# EAGLE board quadcopter (EAGLE 8.1.1)
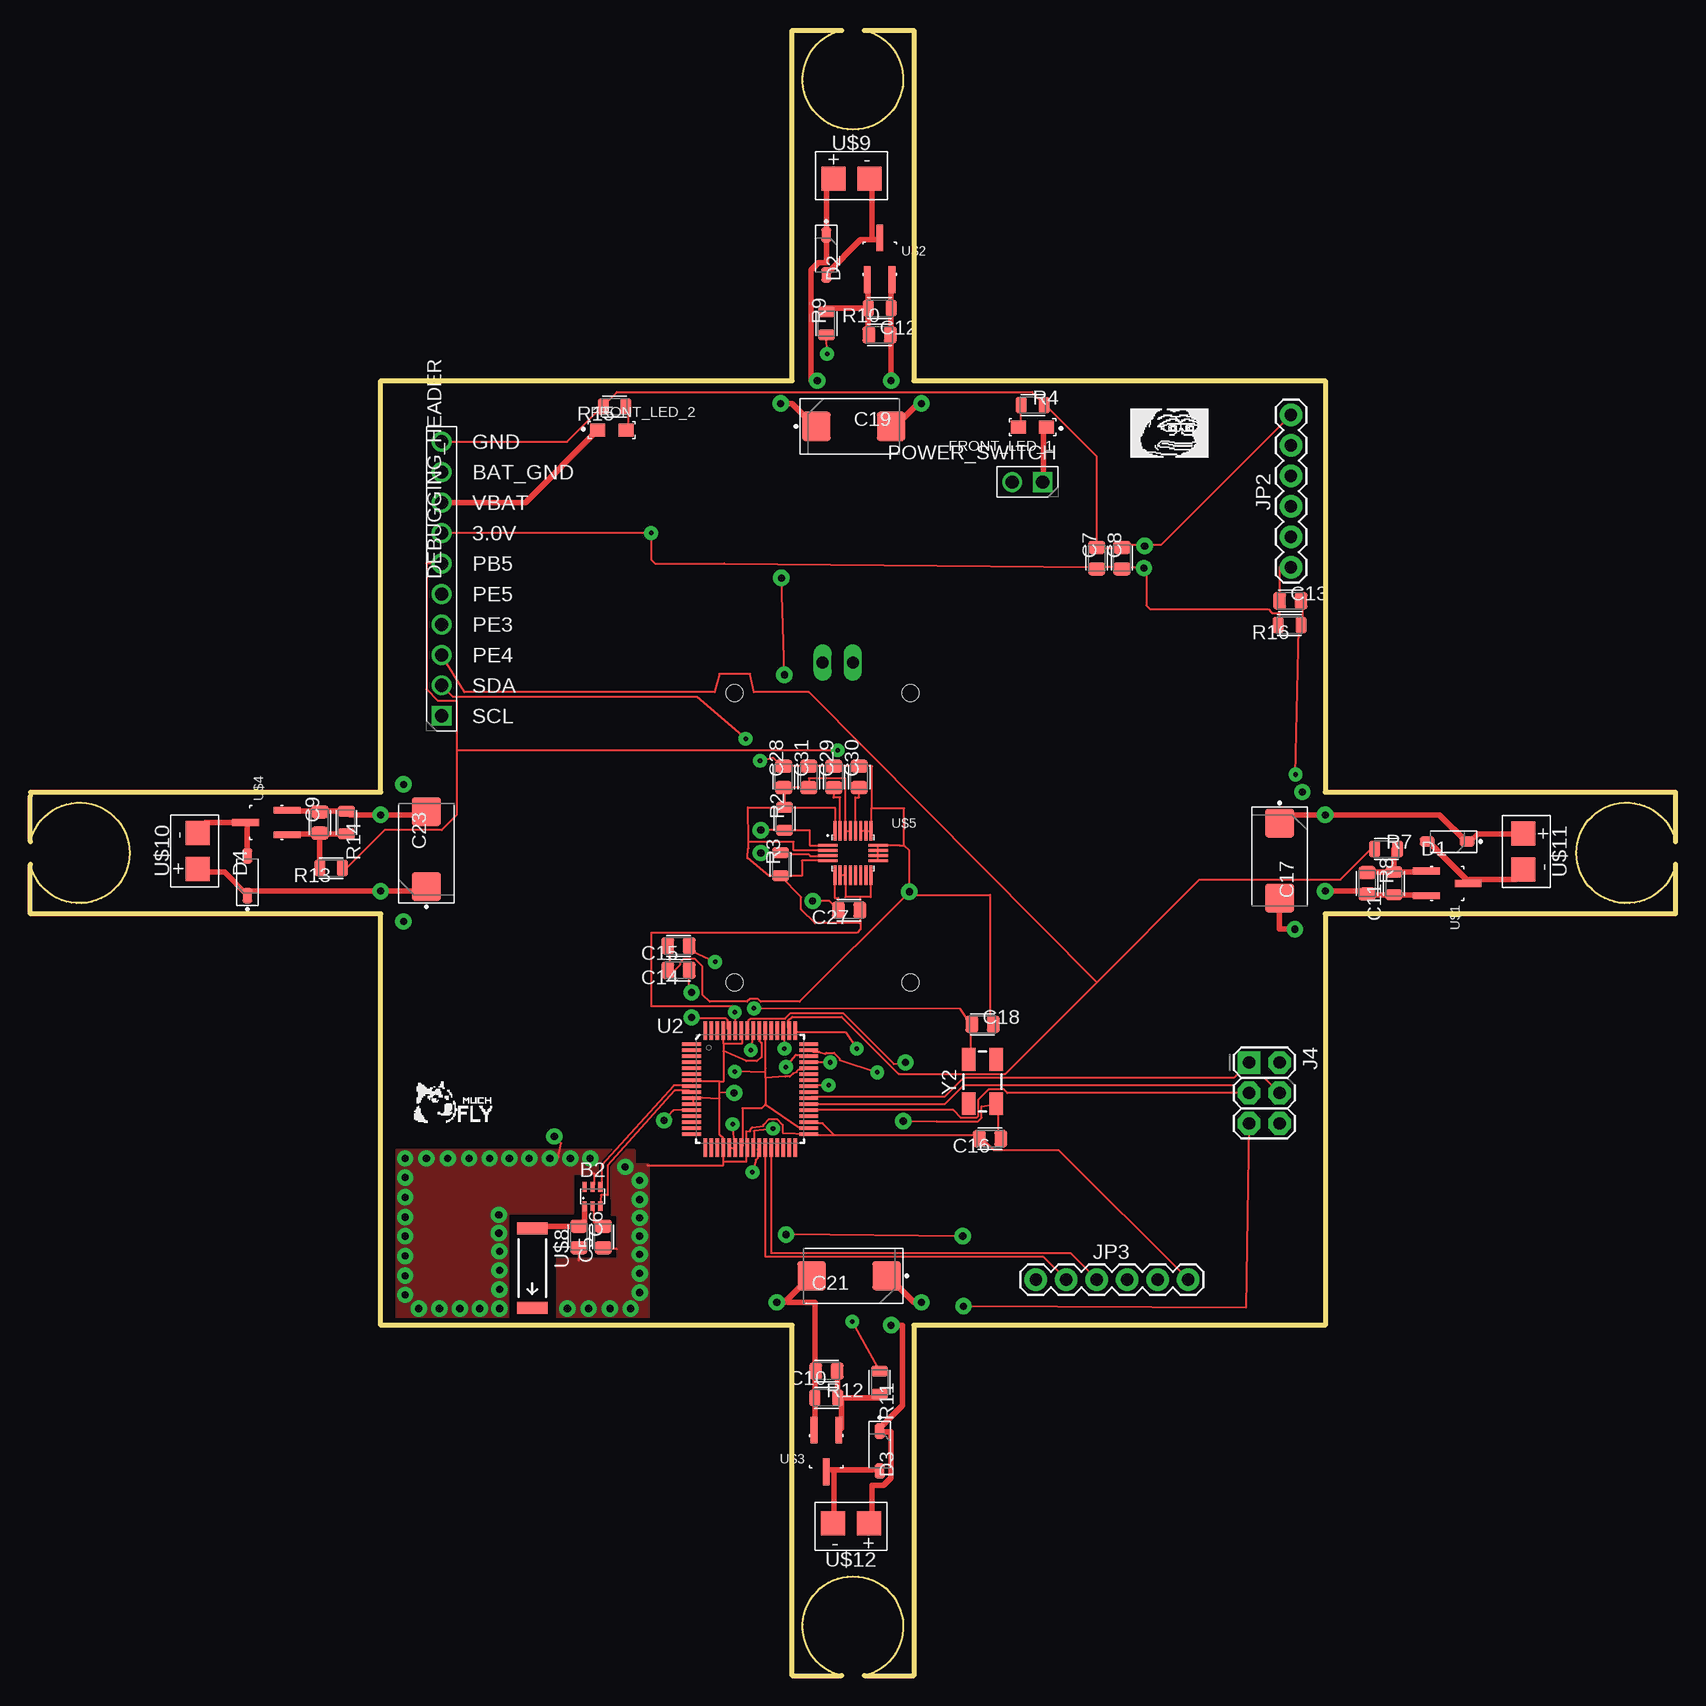
[diagram p0: board, top side]
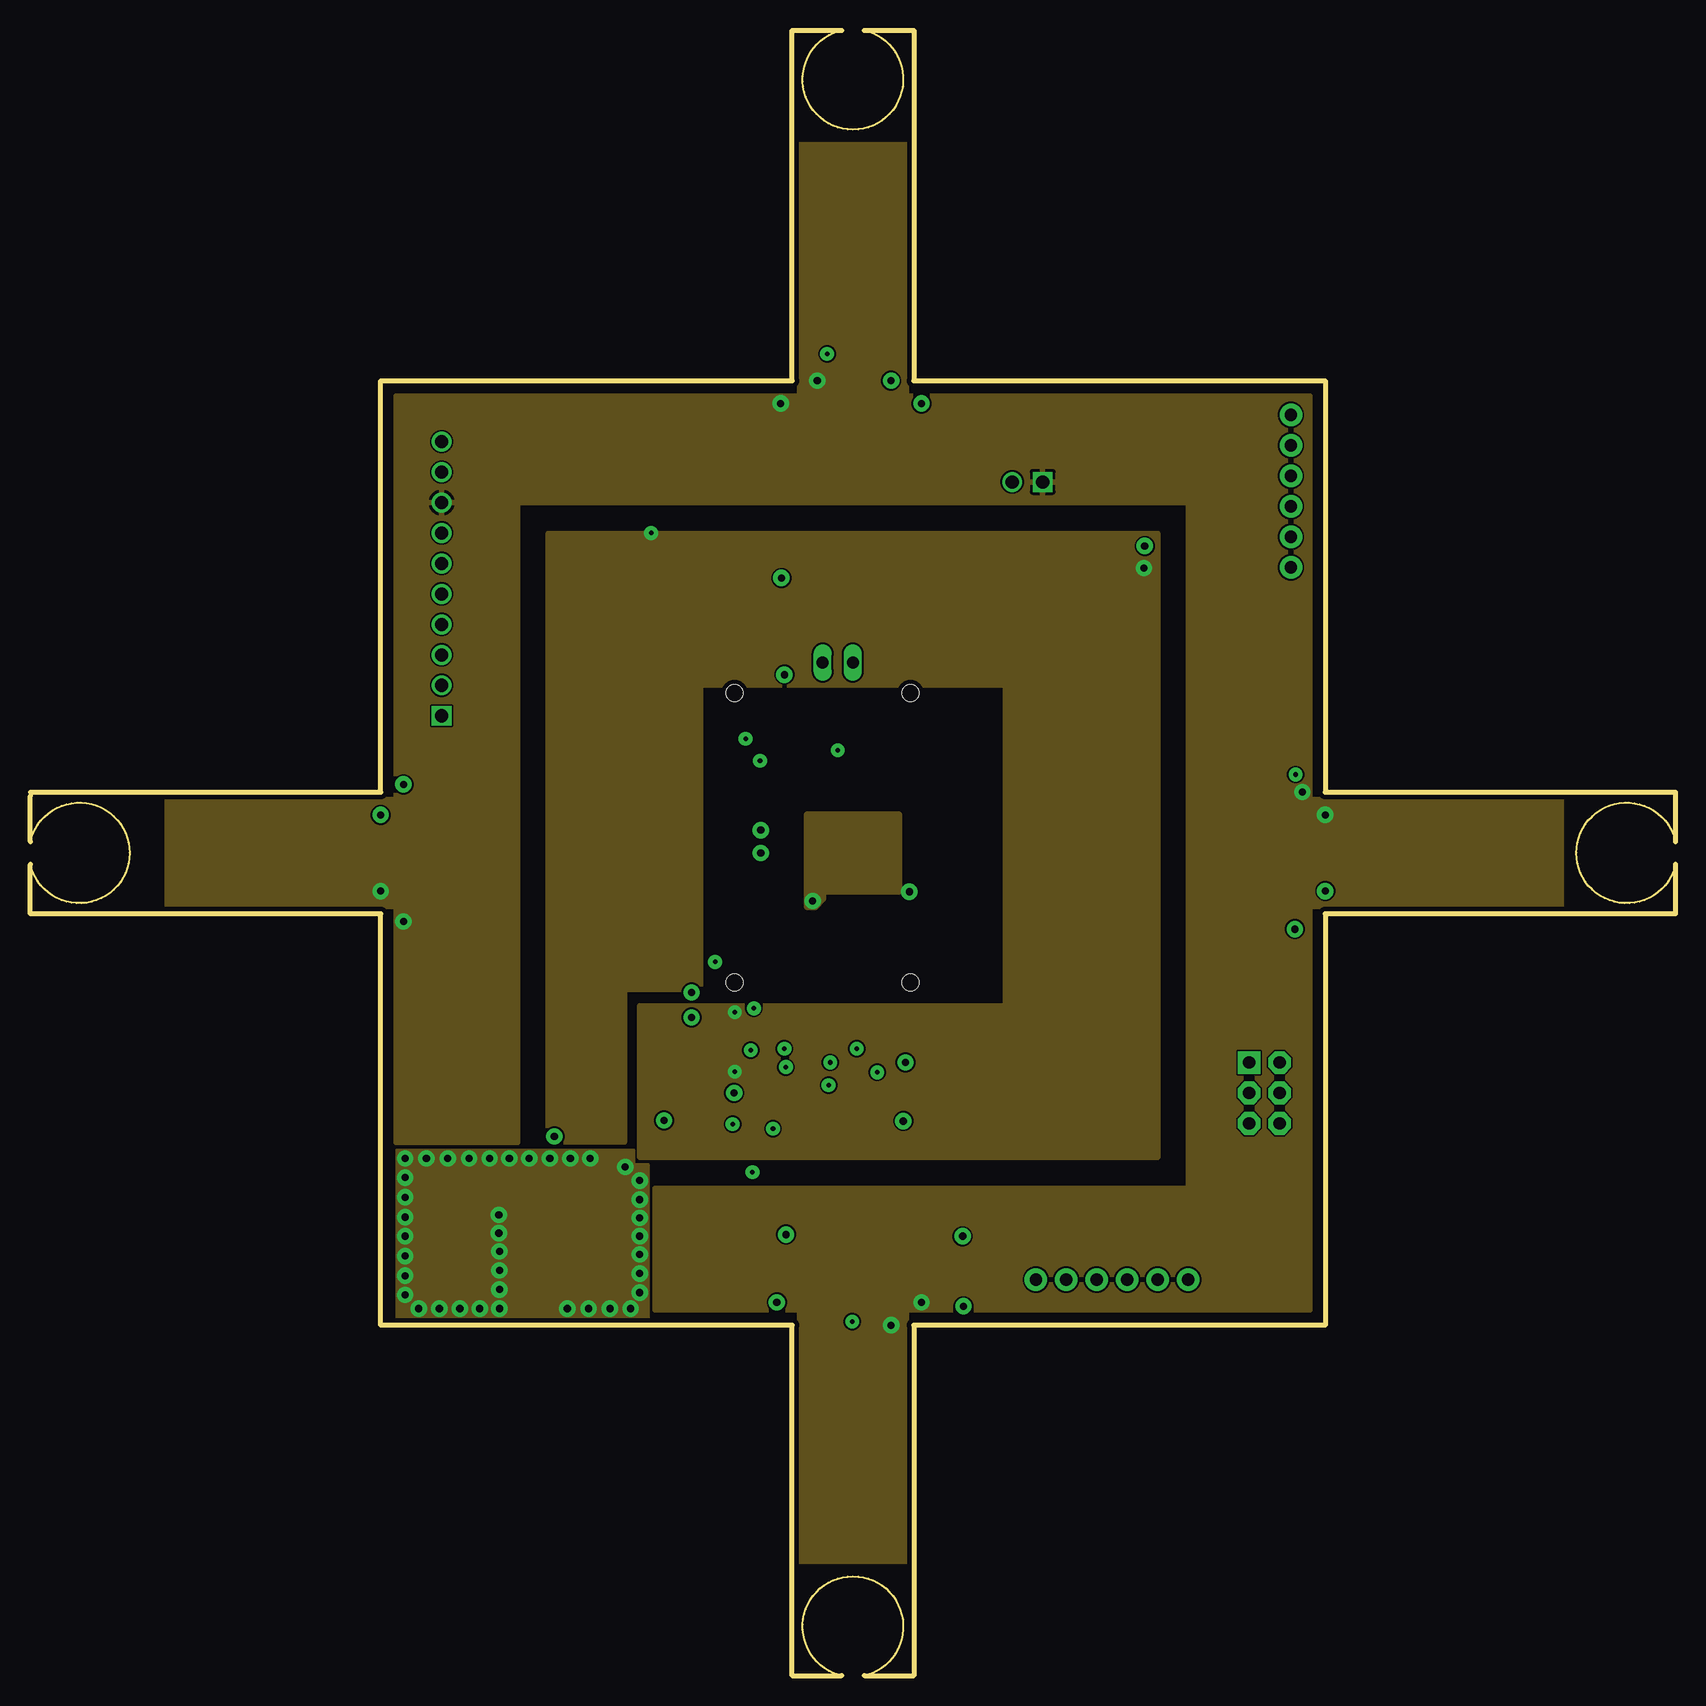
[diagram p1: board, inner layer Route2]
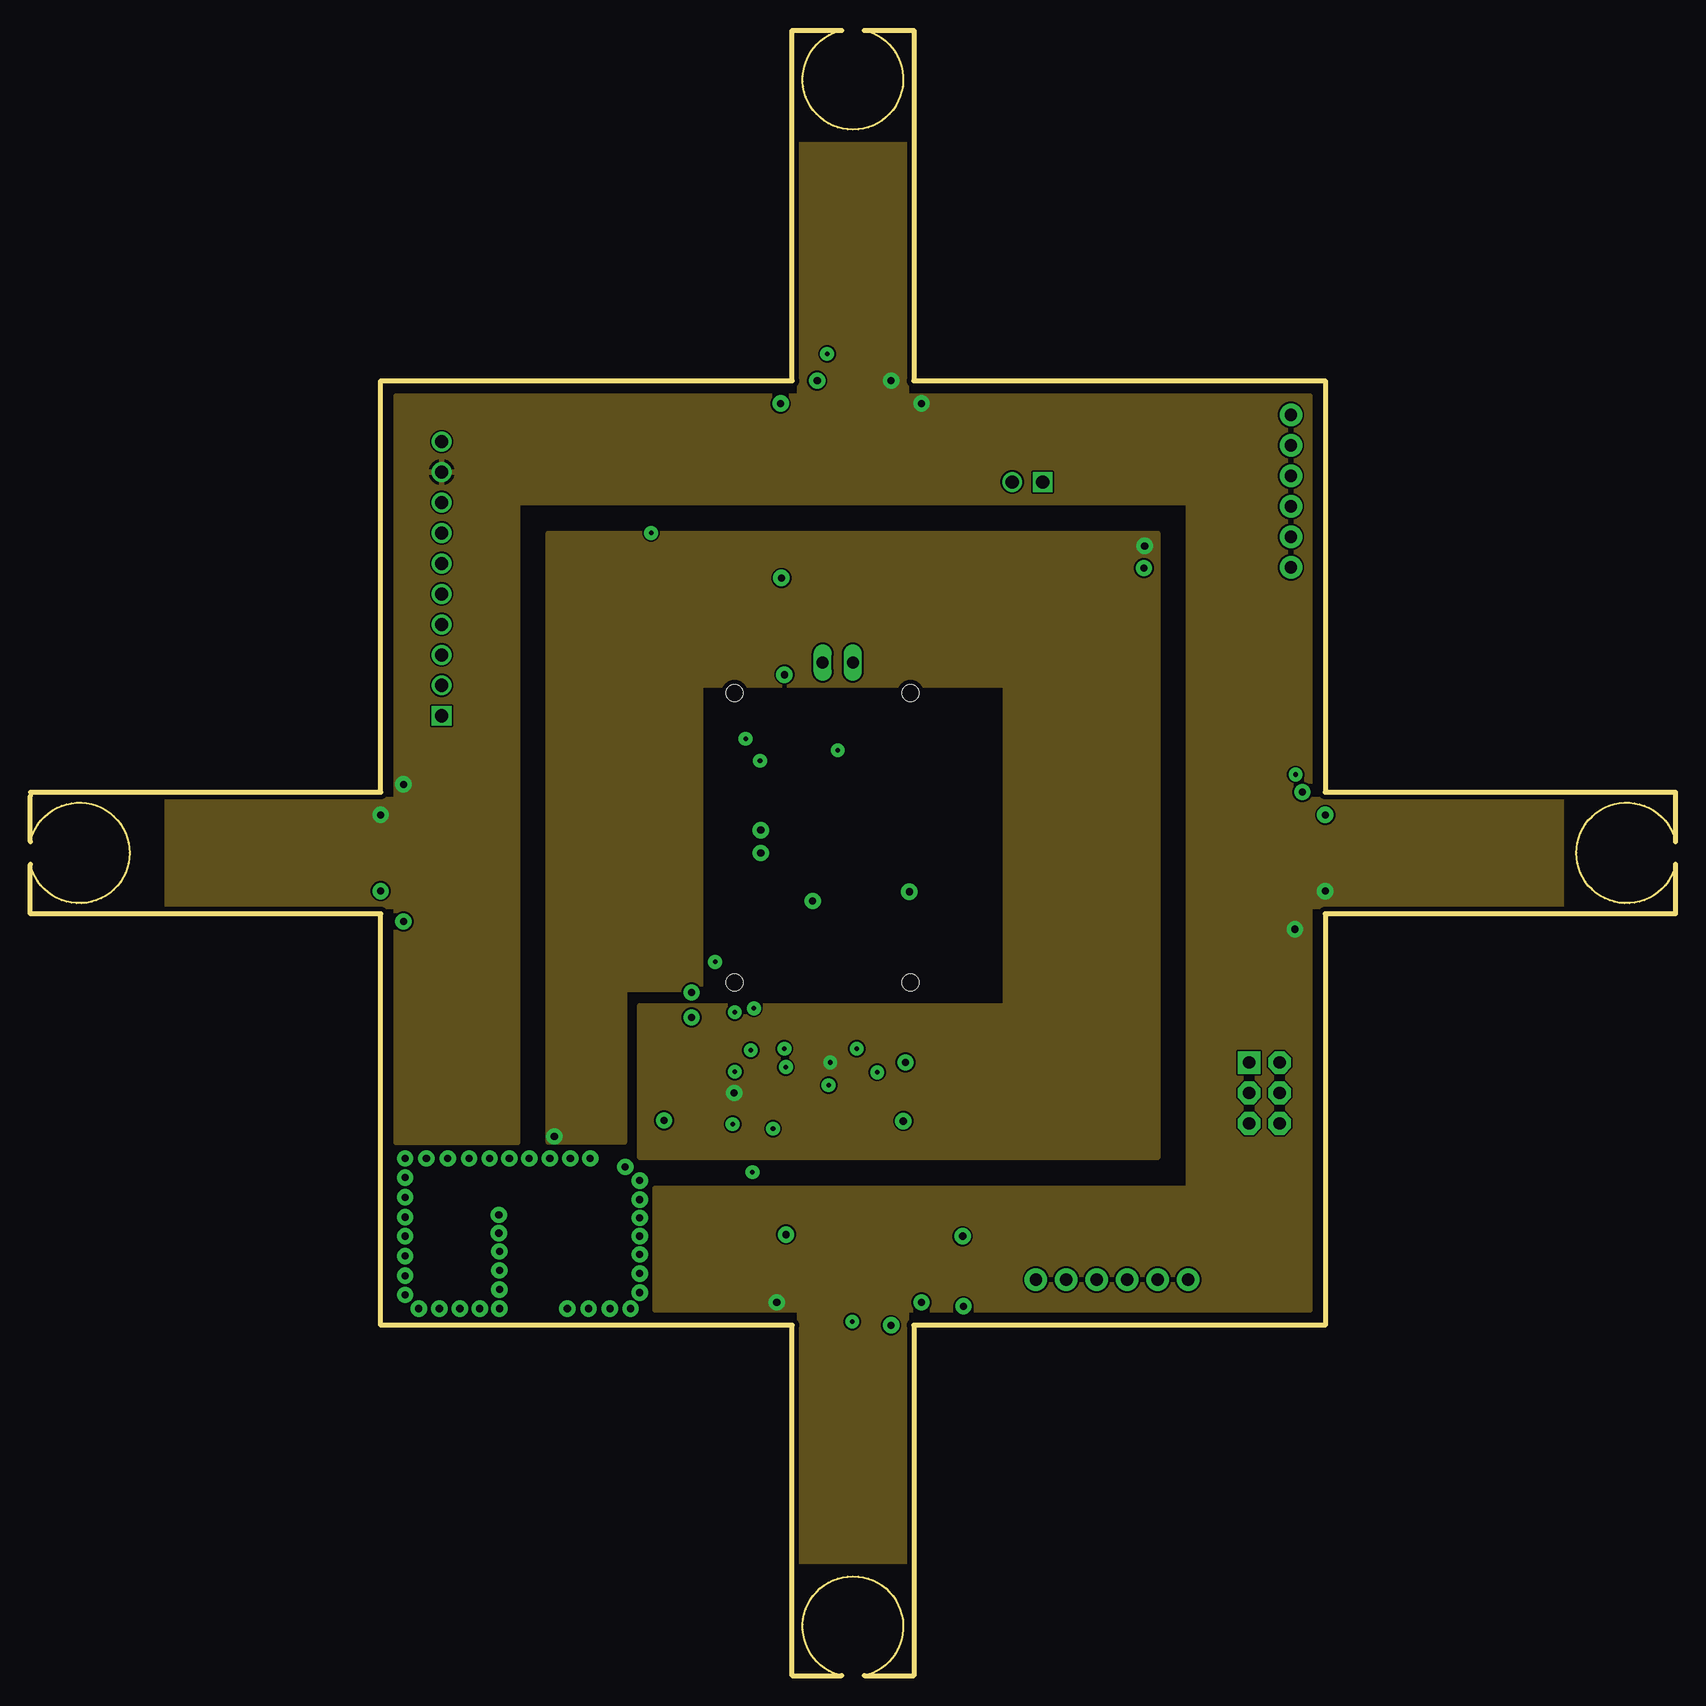
[diagram p2: board, inner layer Route15]
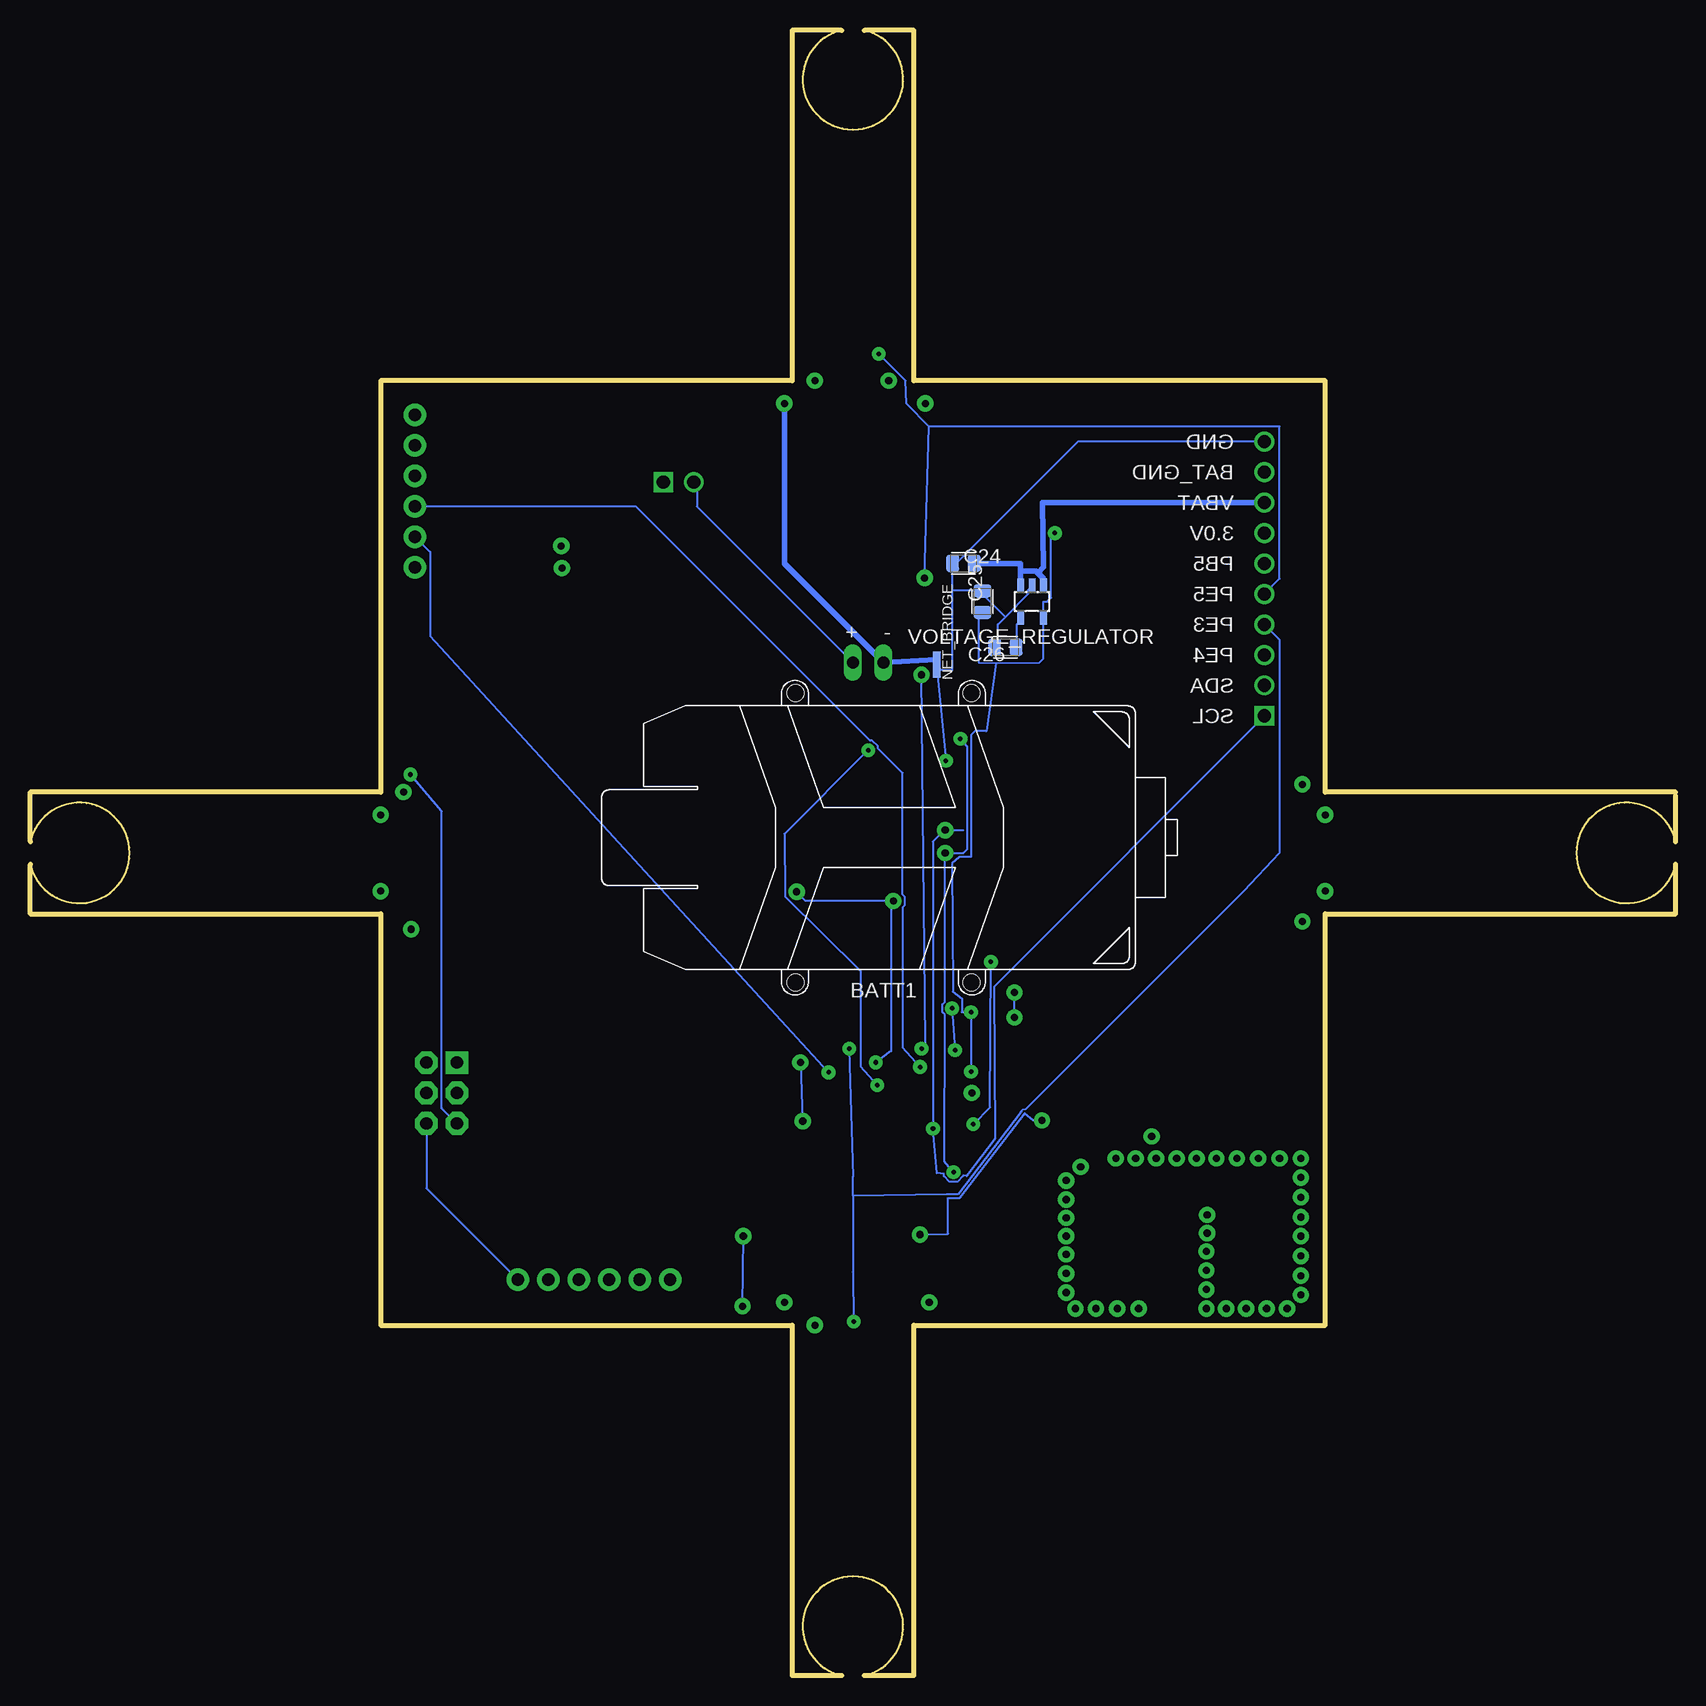
[diagram p3: board, bottom side, seen from below]

Size 137.21 x 137.21 mm. Coordinates in mm from the lower left corner, seen from the top.
Outline: 0.02,73.68 29.23,73.68 29.23,107.97 63.52,107.97 63.52,137.18 67.65,137.18
Outline: 137.21,67.8 arc-338 137.21,69.4
Outline: 137.18,67.65 137.18,63.52 107.97,63.52 107.97,29.23 73.68,29.23 73.68,0.02 69.56,0.02
Outline: 137.18,69.56 137.18,73.68 107.97,73.68 107.97,107.97 73.68,107.97 73.68,137.18 69.56,137.18
Outline: 69.4,137.21 arc-338 67.8,137.21
Outline: 0,69.4 arc-338 0,67.8
Outline: 0.02,67.65 0.02,63.52 29.23,63.52 29.23,29.23 63.52,29.23 63.52,0.02 67.65,0.02
Outline: 0.02,69.56 0.02,73.37
Outline: 67.8,0 arc-338 69.4,0
Copper layers (1*2*15*16): Top 0.035559375mm / dielectric 1.501140625mm / Route2 0.035559375mm / dielectric 0.149859375mm / Route15 0.035559375mm / dielectric 0.200659375mm / Bottom 0.035559375mm
Design rules "4pcb-66board": minimum track width 6mil, minimum drill 15mil, track to track 6mil, track to pad 6mil, pad to pad 6mil, via to via 6mil, smd to smd 6mil, copper to edge 15mil, drill to drill 10mil, minimum pad ring 10mil, minimum via ring 15mil, stop-mask expansion 4mil, vias tented up to drill 0mil, thermal gap 10mil
Net classes: 1 RFSIG: width 0.457 mm; 2 HIGHCURRENT: width 0.457 mm
tRestrict: 17 lines
bRestrict: area 64.8,65.4 to 72.4,71.8

## Footprints (pad centres in the part's own frame; a part is rotated, then mirrored left to right if it is on the bottom)
BALUN = smd 0.35 x 0.8: 1 -0.65,-0.8; 2 0,-0.8; 3 0.65,-0.8; 4 0.65,0.8; 5 0,0.8; 6 -0.65,0.8
BATTERY-W/HOLDER-380MAH-HUBSAN = drill 1 long: + -2.54,14.605; - 0,14.605 | hole 1.4: -7.35,-12.05; -7.35,12.05; 7.35,-12.05; 7.35,12.05
CAPC2012X140_HS = smd 1.08 x 1.42: 1 -0.895,0; 2 0.895,0
CAPMP7343X310_HS = smd 2.37 x 2.43: 1 -3.12,0; 2 3.12,0
SOD3716X135_HS = smd 1.25 x 0.8: A 1.665,0; C -1.665,0
HDRV10W63P254_10X1_2540X254H838_HS = drill 1.1 pad 1.65 square: 1 0,0 | drill 1.1 pad 1.65: 2 2.54,0; 3 5.08,0; 4 7.62,0; 5 10.16,0; 6 12.7,0; 7 15.24,0; 8 17.78,0; 9 20.32,0; 10 22.86,0
KINGBRIGHT_LED = smd 1.25 x 1.1: P$1 0,0; P$2 2.35,0
2X3-NS = drill 1.016 pad 1.88 square: 1 -2.54,-1.27 | drill 1.016 pad 1.88 octagon: 2 -2.54,1.27; 3 0,-1.27; 4 0,1.27; 5 2.54,-1.27; 6 2.54,1.27
FTDI_BASIC = drill 1.016 pad 1.88: CTS 10.16,0; DTR 0,0; GND 12.7,0; RXI 2.54,0; TXO 5.08,0; VCC 7.62,0
NET_BRIDGE = smd 1.27 x 0.635: P$1 0,0; P$2 0.9,0
MALE_HEADER_2X1_0.1IN = drill 1.1 pad 1.65 square: 1 0,0 | drill 1.1 pad 1.65: 2 2.54,0
RESC2012X60_HS = smd 0.92 x 1.38: 1 -0.955,0; 2 0.955,0
QFN-64 = smd 1.562 x 0.28: 1 -4.881,3.75; 2 -4.881,3.25; 3 -4.881,2.75; 4 -4.881,2.25; 5 -4.881,1.75; 6 -4.881,1.25; 7 -4.881,0.75; 8 -4.881,0.25; 9 -4.881,-0.25; 10 -4.881,-0.75; 11 -4.881,-1.25; 12 -4.881,-1.75; 13 -4.881,-2.25; 14 -4.881,-2.75; 15 -4.881,-3.25; 16 -4.881,-3.75; 33 4.881,-3.75; 34 4.881,-3.25; 35 4.881,-2.75; 36 4.881,-2.25; 37 4.881,-1.75; 38 4.881,-1.25; 39 4.881,-0.75; 40 4.881,-0.25; 41 4.881,0.25; 42 4.881,0.75; 43 4.881,1.25; 44 4.881,1.75; 45 4.881,2.25; 46 4.881,2.75; 47 4.881,3.25; 48 4.881,3.75 | smd 0.28 x 1.562: 17 -3.75,-4.881; 18 -3.25,-4.881; 19 -2.75,-4.881; 20 -2.25,-4.881; 21 -1.75,-4.881; 22 -1.25,-4.881; 23 -0.75,-4.881; 24 -0.25,-4.881; 25 0.25,-4.881; 26 0.75,-4.881; 27 1.25,-4.881; 28 1.75,-4.881; 29 2.25,-4.881; 30 2.75,-4.881; 31 3.25,-4.881; 32 3.75,-4.881; 49 3.75,4.881; 50 3.25,4.881; 51 2.75,4.881; 52 2.25,4.881; 53 1.75,4.881; 54 1.25,4.881; 55 0.75,4.881; 56 0.25,4.881; 57 -0.25,4.881; 58 -0.75,4.881; 59 -1.25,4.881; 60 -1.75,4.881; 61 -2.25,4.881; 62 -2.75,4.881; 63 -3.25,4.881; 64 -3.75,4.881
MOFSET_SI2302CDS-T1-E3CT-ND = smd 0.559 x 2.224: P$1 -1.032,-1.734; P$2 1.032,-1.734; P$3 0,1.734
IMU_497-14946-1-ND = smd 0.23 x 1.6: P$1 -1.505,1.85; P$6 -1.505,-1.85; P$7 -1.075,-1.85; P$8 -0.645,-1.85; P$9 -0.215,-1.85; P$10 0.215,-1.85; P$11 0.645,-1.85; P$12 1.075,-1.85; P$13 1.505,-1.85; P$18 1.505,1.85; P$19 1.075,1.85; P$20 0.645,1.85; P$21 0.215,1.85; P$22 -0.215,1.85; P$23 -0.645,1.85; P$24 -1.075,1.85 | smd 1.6 x 0.23: P$2 -2.1,0.645; P$3 -2.1,0.215; P$4 -2.1,-0.215; P$5 -2.1,-0.645; P$14 2.1,-0.645; P$15 2.1,-0.215; P$16 2.1,0.215; P$17 2.1,0.645
ANTENNA-CHIP5 = smd 1.016 x 2.54: FEED -3.302,0; NC 3.302,0
MOTOR_PADS = smd 2 x 2: V+ -1,0; V- 2,0
SOT23-DBV = smd 0.55 x 1.2: 1 -0.95,-1.3; 2 0,-1.3; 3 0.95,-1.3; 4 0.95,1.3; 5 -0.95,1.3
CRYSTAL-SMD-5X3 = smd 1.9 x 1.1: 1 -1.85,-1.15; 2 1.85,-1.15; 3 1.85,1.15; 4 -1.85,1.15

## Placement (x,y rotation side)
B2  BALUN0805  [BALUN]  46.89,39.96 0 top
BATT1  BATTERY-HUBSAN-W/HOLDER  [BATTERY-W/HOLDER-380MAH-HUBSAN]  66.06,69.87 0 bottom
C5  0.75pF  [CAPC2012X140_HS]  45.74,36.6 270 top
C6  22pF  [CAPC2012X140_HS]  47.77,36.6 90 top
C7  1uF  [CAPC2012X140_HS]  88.92,93.18 90 top
C8  1uF  [CAPC2012X140_HS]  91.02,93.18 90 top
C9  0.1uF  [CAPC2012X140_HS]  24.15,71.14 90 top
C10  0.1uF  [CAPC2012X140_HS]  66.38,25.42 180 top
C11  0.1uF  [CAPC2012X140_HS]  111.47,66.06 270 top
C12  0.1uF  [CAPC2012X140_HS]  70.83,111.78 0 top
C13  0.1uF  [CAPC2012X140_HS]  105.05,89.62 0 top
C14  12pF  [CAPC2012X140_HS]  54.06,58.82 180 top
C15  12pF  [CAPC2012X140_HS]  54.06,60.86 180 top
C16  12pF  [CAPC2012X140_HS]  80.03,44.79 180 top
C17  220uF  [CAPMP7343X310_HS]  104.16,67.97 270 top
C18  12pF  [CAPC2012X140_HS]  79.4,54.32 0 top
C19  220uF  [CAPMP7343X310_HS]  68.67,104.16 0 top
C21  220uF  [CAPMP7343X310_HS]  68.29,33.36 180 top
C23  220uF  [CAPMP7343X310_HS]  33.04,68.92 90 top
C24  1uF  [CAPC2012X140_HS]  59.4,92.73 0 bottom
C25  1uF  [CAPC2012X140_HS]  57.81,89.56 90 bottom
C26  0.01uF  [CAPC2012X140_HS]  55.9,85.75 180 bottom
C27  0.1uF  [CAPC2012X140_HS]  68.29,63.84 180 top
C28  0.1uF  [CAPC2012X140_HS]  62.82,74.95 90 top
C29  0.1uF  [CAPC2012X140_HS]  67.02,74.95 90 top
C30  0.01uF  [CAPC2012X140_HS]  69.11,74.95 90 top
C31  10uF  [CAPC2012X140_HS]  64.92,74.95 90 top
D1  360mV  [SOD3716X135_HS]  118.13,69.56 180 top
D2  360mV  [SOD3716X135_HS]  66.38,118.45 270 top
D3  360mV  [SOD3716X135_HS]  70.83,18.76 270 top
D4  360mV  [SOD3716X135_HS]  18.12,66.7 90 top
DEBUGGING_HEADER  [HDRV10W63P254_10X1_2540X254H838_HS]  34.31,80.03 90 top
FRONT_LED_1  GREEN  [KINGBRIGHT_LED]  84.73,104.1 180 top
FRONT_LED_2  GREEN  [KINGBRIGHT_LED]  47.33,103.84 0 top
J4  AVR_SPI_PRG_6NS  [2X3-NS]  102.89,48.6 270 top
JP2  FTDI_BASICPTH  [FTDI_BASIC]  105.12,92.42 90 top
JP3  FTDI_BASICPTH  [FTDI_BASIC]  83.84,33.04 0 top
NET_BRIDGE  NET_BRIDGE  [NET_BRIDGE]  61.62,83.84 90 bottom
POWER_SWITCH  [MALE_HEADER_2X1_0.1IN]  84.41,99.53 180 top
R2  10K  [RESC2012X60_HS]  62.89,71.46 90 top
R3  10K  [RESC2012X60_HS]  62.57,67.65 90 top
R4  20  [RESC2012X60_HS]  83.59,105.94 0 top
R7  100  [RESC2012X60_HS]  113.05,68.92 0 top
R8  10K  [RESC2012X60_HS]  113.69,66.06 90 top
R9  100  [RESC2012X60_HS]  66.38,112.74 90 top
R10  10K  [RESC2012X60_HS]  70.83,114.01 180 top
R11  100  [RESC2012X60_HS]  70.83,24.47 270 top
R12  10K  [RESC2012X60_HS]  66.38,23.2 0 top
R13  100  [RESC2012X60_HS]  25.11,67.33 180 top
R14  10K  [RESC2012X60_HS]  26.38,71.14 270 top
R15  20  [RESC2012X60_HS]  48.73,105.81 180 top
R16  10K  [RESC2012X60_HS]  104.99,87.59 180 top
U2  ATMEGA128RFA1  [QFN-64]  60.03,48.92 0 top
U$1  [MOFSET_SI2302CDS-T1-E3CT-ND]  118.13,66.06 270 top
U$2  [MOFSET_SI2302CDS-T1-E3CT-ND]  70.83,118.13 0 top
U$3  [MOFSET_SI2302CDS-T1-E3CT-ND]  66.38,18.76 180 top
U$4  [MOFSET_SI2302CDS-T1-E3CT-ND]  19.71,71.14 90 top
U$5  IMU_497-14946-1-ND  [IMU_497-14946-1-ND]  68.6,68.6 0 top
U$6  [LE_PEPE]  91.78,101.62 0 top
U$7  [DOGE]  32.09,45.74 0 top
U$8  ANTENNA2SMD5  [ANTENNA-CHIP5]  41.87,34 270 top
U$9  MOTOR_PADS  [MOTOR_PADS]  67.97,124.8 0 top
U$10  MOTOR_PADS  [MOTOR_PADS]  13.99,68.29 90 top
U$11  MOTOR_PADS  [MOTOR_PADS]  124.48,69.24 270 top
U$12  MOTOR_PADS  [MOTOR_PADS]  68.92,12.72 180 top
VOLTAGE_REGULATOR  TPS73633-DBVT  [SOT23-DBV]  53.68,89.56 180 bottom
Y2  [CRYSTAL-SMD-5X3]  79.4,49.55 90 top

## Library data of the parts
B2 = quadparts_prebuilt; DATASHEET: http://katalog.we-online.de/pbs/datasheet/748421245.pdf; DIST: Digikey; DISTPN: 732-2230-6-ND; MFR: Wurth Electronics Inc; MPN: 748421245; PRICE: 2.63
BATT1 = quadparts_prebuilt; CREATOR: Swanson; DIST: AMAZON; DISTPN: http://www.amazon.com/dp/B00RROB6Q4?smid=AMNTPWSAB5H0S; MFR: HUBSAN; MPN: X4-H107C-8-in-1
C5 = quadparts_prebuilt; DIST: Digikey; DISTPN: 490-3585-1-ND; MFR: Murata Electronics North America; MPN: GQM2195C2AR75CB01D
C6 = quadparts_prebuilt; DIST: Digikey; DISTPN: 490-5534-1-ND; MFR: Murata Electronics North America; MPN: GRM21A5C2E220JW01D
C7 C8 C24 C25 = quadparts_prebuilt; DIST: Digikey; DISTPN: 490-4736-1-ND; MFR: Murata Electronics North America; MPN: GRM21BR71H105KA12L
C9-C13 C27-C29 = quadparts_prebuilt; DIST: Digikey; DISTPN: 490-1666-1-ND; MFR: Murata Electronics North America; MPN: GRM21BR71H104KA01L
C14-C16 C18 = quadparts_prebuilt; DIST: Digikey; DISTPN: 490-5531-1-ND; MFR: Murata Electronics North America; MPN: GRM21A5C2E120JW01D
C17 C19 C21 C23 = quadparts_prebuilt; DIST: Digikey; DISTPN: 478-8912-1-ND; MFR: AVX Corporation; MPN: TAJD227K006RNJ
C26 C30 = quadparts_prebuilt; DIST: Digikey; DISTPN: 490-8295-1-ND; MFR: Murata Electronics North America; MPN: GRM2195C1H103FA01D
C31 = quadparts_prebuilt; DIST: Digikey; DISTPN: 490-5523-1-ND; MFR: Murata Electronics North America; MPN: GRM21BR61E106KA73L
D1-D4 = quadparts_prebuilt; DIST: Digikey; DISTPN: CRS08QMCT-ND; MFR: Toshiba Semiconductor and Storage; MPN: CRS08(TE85L,Q,M)
DEBUGGING_HEADER = quadparts_prebuilt; DIST: Digikey; DISTPN: 609-3250-ND; MFR: Amphenol FCI; MPN: 68000-110HLF
FRONT_LED_1 FRONT_LED_2 = LEDs; CREATOR: Chris Miranda; DIST: Digikey; DISTPN: 754-1795-1-ND; MFR: Kingbright; MPN: APT2012ZGCK
J4 = quadparts_prebuilt; DATASHEET: http://portal.fciconnect.com/Comergent//fci/drawing/67996.pdf; DIST: Digikey; DISTPN: 609-3234-ND; MFR: Amphenol FCI; MPN: 67997-206HLF; PRICE: 0.31
JP2 JP3 = quadparts_prebuilt; DATASHEET: http://portal.fciconnect.com/Comergent//fci/drawing/68015.pdf; DIST: Digikey; DISTPN: 609-3327-ND; MFR: Amphenol FCI; MPN: 68016-406HLF; PRICE: 0.33
NET_BRIDGE = quadparts_jay; CREATOR: Chris Miranda; DIST: none; DISTPN: none; MFR: none; MPN: none
POWER_SWITCH = quadparts_jay; CREATOR: SWANSON; DIST: Digikey; DISTPN: 3M9447-ND; MFR: 3M; MPN: 961102-6404-AR
R2 R3 R8 R10 R12 R14 R16 = quadparts_prebuilt; DIST: Digikey; DISTPN: 311-10KARCT-ND; MFR: Yageo; MPN: RC0805JR-0710KL
R4 R15 = quadparts_prebuilt; CREATOR: Chris Miranda; DIST: Digikey; DPN: 311-20ARCT-ND; MFR: Yageo; MPN: RC0805JR-0720RL
R7 R9 R11 R13 = quadparts_prebuilt; DIST: Digikey; DISTPN: 311-100ARCT-ND; MFR: Yageo; MPN: RC0805JR-07100RL
U2 = quadparts_prebuilt; CREATOR: Swanson; DATASHEET: http://www.atmel.com/Images/Atmel-8266-MCU_Wireless-ATmega128RFA1_Datasheet.pdf; DIST: Digikey; DISTPN: ATMEGA128RFA1-ZUR00DKR-ND; MFR: Atmel; MPN: ATMEGA128RFA1-ZUR00; PRICE: 10.21
U$1-U$4 = quadparts_jay; CREATOR: Jay Ives; DIST: Digikey; DISTPN: SI2302CDS-T1-E3CT-ND; MFR: Vishay Siliconix; MPN: SI2302CDS-T1-E3
U$5 = quadparts_jay; CREATOR: Jay Ives; DIST: Digikey; DISTPN: 497-14946-1-ND; MFR: STMicroelectronics; MPN: LSM9DS1TR
U$6 U$7 = quadparts_jay
U$8 = quadparts_prebuilt; DATASHEET: http://www.linxtechnologies.com/resources/data-guides/ant-xxx-chp-x.pdf; DIST: Digikey; DISTPN: ANT-2.45-CHPCT-ND; MFR: Linx Technologies Inc.; MPN: ANT-2.45-CHP-T; PRICE: 3.16
U$9-U$12 = quadparts_prebuilt; DIST: NA; DISTPN: NA; MFR: NA; MPN: NA
VOLTAGE_REGULATOR = quadparts_prebuilt; DATASHEET: http://www.ti.com/lit/ds/symlink/lp3985.pdf; DIST: Digikey; DISTPN: LP3985IM5X-3.0/NOPBCT-ND; MFR: Texas Instruments; MPN: LP3985IM5X-3.0/NOPB; PRICE: 0.59
Y2 = quadparts_prebuilt; DATASHEET: http://www.abracon.com/Resonators/abm3b.pdf; DIST: Digikey; DISTPN: 535-9122-1-ND; MFR: Abracon LLC; MPN: ABM3B-16.000MHZ-B2-T; PRICE: 0.68; PROD_ID: XTAL-08218

## Nets
3.0V: C7.1 C8.1 C25.1 C27.1 C28.1 C31.1 DEBUGGING_HEADER.7 R2.2 R3.1 R16.2 U2.23 U2.34 U2.44 U2.54 U2.59 U$5.P$1 U$5.P$3 U$5.P$5 U$5.P$7 U$5.P$8 U$5.P$13 U$5.P$22 U$5.P$23 VOLTAGE_REGULATOR.5
A0: U2.63
A1: U2.64
A2: U2.1
A3: U2.2
A4: U2.3
A5: U2.4
A6: U2.5
A7: U2.6
AREF: U2.62
AVDD: C14.1 U2.60
BAT_GND [HIGHCURRENT]: BATT1.- C9.2 C10.2 C11.2 C12.2 C17.2 C19.2 C21.2 C23.2 DEBUGGING_HEADER.9 NET_BRIDGE.P$2 R8.1 R10.1 R12.1 R14.1 U$1.P$2 U$2.P$2 U$3.P$2 U$4.P$2
DTR: C13.1 JP2.DTR
DVDD: C15.1 U2.21 U2.22
FILTERED1 [HIGHCURRENT]: C9.1 R13.2 R14.2 U$4.P$1
FILTERED2 [HIGHCURRENT]: C12.1 R9.2 R10.2 U$2.P$1
FILTERED3 [HIGHCURRENT]: C10.1 R11.2 R12.2 U$3.P$1
FILTERED4 [HIGHCURRENT]: C11.1 R7.2 R8.2 U$1.P$1
FLYBACK1 [HIGHCURRENT]: D4.A U$4.P$3 U$10.V-
FLYBACK2 [HIGHCURRENT]: D2.A U$2.P$3 U$9.V-
FLYBACK3 [HIGHCURRENT]: D3.A U$3.P$3 U$12.V-
FLYBACK4 [HIGHCURRENT]: D1.A U$1.P$3 U$11.V-
GND: B2.5 C5.2 C6.1 C7.2 C8.2 C14.2 C15.2 C16.2 C18.2 C24.1 C25.2 C26.2 C27.2 C28.2 C29.2 C30.2 C31.2 DEBUGGING_HEADER.10 J4.6 JP2.GND JP3.GND NET_BRIDGE.P$1 R4.2 R15.2 U2.7 U2.10 U2.11 U2.20 U2.24 U2.33 U2.35 U2.45 U2.55 U2.58 U2.61 U$5.P$6 U$5.P$14 U$5.P$15 U$5.P$16 U$5.P$17 U$5.P$18 U$5.P$19 U$5.P$20 VOLTAGE_REGULATOR.2
MISO: J4.1 U2.39
MOSI: J4.4 U2.38
N$1: FRONT_LED_1.P$2 R4.1
N$2: C30.1 U$5.P$21
N$5: FRONT_LED_2.P$2 R15.1
N$7: B2.2 C6.2
N$10: C29.1 U$5.P$24
N$12: C16.1 U2.57 Y2.1
N$14: C18.1 U2.56 Y2.3
N$18: C26.1 VOLTAGE_REGULATOR.4
PB4: U2.40
PB5: DEBUGGING_HEADER.6 R13.1 U2.41
PB6: U2.42
PB7: U2.43
PD4: U2.29
PD5: U2.30
PD6: U2.31
PD7: U2.32
PE2: U2.48
PE3: DEBUGGING_HEADER.4 R11.1 U2.49
PE4: DEBUGGING_HEADER.3 R7.1 U2.50
PE5: DEBUGGING_HEADER.5 R9.1 U2.51
PE6: U2.52
PE7: U2.53
PG0: U2.14
PG1: U2.15
PG2: U2.16
PG5: U2.19
RESET: C13.2 J4.5 R16.1 U2.12
RFANT [RFSIG]: B2.1 C5.1 U$8.FEED
RFN: B2.3 U2.9
RFP: B2.4 U2.8
RSTON: U2.13
RX0: JP2.TXO U2.46
RX1: JP3.RXI U2.27
SCK: J4.3 U2.37
SCL: DEBUGGING_HEADER.1 R2.1 U2.25 U$5.P$2
SDA: DEBUGGING_HEADER.2 R3.2 U2.26 U$5.P$4
SSN: U2.36
TX0: JP2.RXI U2.47
TX1: JP3.TXO U2.28
V: BATT1.+ POWER_SWITCH.2
VBAT [HIGHCURRENT]: C17.1 C19.1 C21.1 C23.1 C24.2 D1.C D2.C D3.C D4.C DEBUGGING_HEADER.8 FRONT_LED_1.P$1 FRONT_LED_2.P$1 POWER_SWITCH.1 U$9.V+ U$10.V+ U$11.V+ U$12.V+ VOLTAGE_REGULATOR.1 VOLTAGE_REGULATOR.3

## Tracks (layer width: path | path; a pad name or v marks a point on that pad's centre or on a via)
3.0V  (via drill 0.38, 0.6)
  Top 0.152: U$5.P$7 U$5.P$8 67.97,66.75 67.97,64.92 69.18,64.92 | 69.18,64.92 C27.1 69.17,63.78 69.17,62.89 | U$5.P$13 70.06,66.75 70.06,64.92 69.18,64.92 | U$5.P$5 64.35,67.96 64.35,66.7 R3.1 | U$5.P$3 63.65,68.82 63.65,69.56 59.9,69.56 | 59.9,69.56 59.84,72.41 R2.2 | U$5.P$1 67.14,70.45 67.14,72.35 62.89,72.35 R2.2 | R2.2 62.89,74.06 C28.1 C31.1 64.92,74.83 66.36,74.83 67.67,74.83 67.97,74.83 67.97,70.45 U$5.P$23 U$5.P$22 | 59.9,69.56 59.9,69 59.87,68.97 59.81,68.17 61.6,66.7 R3.1 | 69.17,62.89 69.17,62.82 69.11,62.76 65.43,62.76 64.28,63.9 64.28,64.92 R3.1 | 61.3,47.65 60.98,47.33 59.4,47.33 59.4,44.15 U2.23 | U2.34 64.79,45.74 64.09,45.74 61.3,47.65 | 61.3,50.31 61.3,50.63 | 61.3,49.87 61.3,50.31 | 61.3,49.87 61.3,47.65 | 61.3,50.63 61.3,53.68 U2.54 | U2.59 58.76,54 v58.76,55.33 58.76,55.84 51.77,55.84 51.77,61.93 68.92,61.93 69.24,62.25 69.24,62.89 69.17,62.89 | R16.2 104.16,87.65 104.16,88.61 103.53,88.61 103.21,88.92 93.37,88.92 93.05,89.24 93.05,92.1 v92.86,92.35 92.73,92.41 91.15,92.41 C8.1 90.83,92.41 88.92,92.41 | DEBUGGING_HEADER.7 v51.77,95.27 51.77,93.05 52.09,92.73 57.87,92.73 88.92,92.41 | 88.92,92.41 C7.1 | 61.34,50.67 61.3,50.63 | 61.3,50.31 v58.76,50.38 | U2.44 64.53,50.54 64.04,50.54 63.9,50.4 63.9,50.32 63.61,50.22 63.35,49.96 62.95,49.96 61.3,49.87
  Bottom 0.152: v58.76,50.38 v58.76,55.33 59.52,55.33 59.52,56.47 60.28,57.05 60.35,67.71 59.71,68.28 58.76,68.28 58.76,78.44 58.44,78.76 57.49,78.76 56.66,84.41 | 56.66,84.41 58.13,84.48 58.13,88.61 57.81,88.92 C25.1 | 56.66,84.41 53.05,84.48 52.73,84.79 52.73,87.97 VOLTAGE_REGULATOR.5 52.73,88.29 52.73,89.56 52.41,89.56 52.09,89.88 52.09,94.95 v51.77,95.27
  pour Route2: 43.2,44.47 43.2,95.27 94,95.27 94,43.2 50.82,43.2 50.82,55.9 81.3,55.9 81.3,82.57 55.9,82.57 55.9,57.17 49.55,57.17 49.55,44.47
AVDD  (via drill 0.6)
  Top 0.152: U2.60 58.15,53.93 58.15,54.67 58.01,54.81 55.16,54.81 55.14,54.82 v55.14,54.89 | v55.14,56.98 54.95,56.98 54.95,58.38 C14.1
  Bottom 0.152: v55.14,54.89 v55.14,56.98
BAT_GND  (via drill 0.6)
  Top 0.457: R8.1 111.46,65.11 C11.2 111.46,65.43 v107.97,65.43 | R8.1 116.23,65.11 U$1.P$2 | R8.1 | 65.43,25.42 R12.1 | R12.1 65.43,20.66 U$3.P$2 | R12.1 | 24.15,72.1 R14.1 | 24.15,72.1 21.61,72.1 U$4.P$2 | 24.15,72.1 C9.2 | R10.1 71.78,116.23 U$2.P$2 | R10.1 71.78,111.78 | R10.1 | 63.05,31.3 62.89,31.14 v62.25,31.14 | 63.05,31.3 65.11,33.36 C21.2 | C23.2 33.04,71.78 v29.23,71.78 26.69,71.78 R14.1 | v74.32,106.07 74,106.07 72.1,104.16 C19.2 | C17.2 104.16,62.25 v105.43,62.25 | v71.78,107.97 71.78,111.78 | 71.78,111.78 C12.2 | R14.1 | 65.43,25.42 65.43,31.14 63.21,31.14 63.05,31.3 | 65.43,25.42 C10.2
  Bottom 0.457: v74.32,106.07 74.32,92.73 BATT1.- NET_BRIDGE.P$2
  other vias: 31.14,74.32
  pour Route15: 30.5,44.47 30.5,106.7 106.7,106.7 106.7,30.5 52.09,30.5 52.09,40.66 96.54,40.66 96.54,97.81 40.66,97.81 40.66,44.47
  pour Route15: 11.45,73.05 30.5,73.05 30.5,64.16 11.45,64.16
  pour Route15: 64.16,127.66 73.05,127.66 73.05,106.7 64.16,106.7
  pour Route15: 106.7,73.05 127.66,73.05 127.66,64.16 106.7,64.16
  pour Route15: 64.16,9.55 64.16,30.5 73.05,30.5 73.05,9.55
DTR
  Top 0.152: JP2.DTR 104.16,92.41 104.16,89.88 C13.1
DVDD  (via drill 0.38)
  Top 0.152: v57.11,59.52 55.27,60.35 C15.1 | v58.57,46 58.76,44.15 U2.22 U2.21
  Bottom 0.152: v57.11,59.52 57.17,47.39 v58.57,46
FILTERED1
  Top 0.457: 24.15,70.19 R13.2 | 24.15,70.19 R14.2 | 24.15,70.19 21.61,70.19 U$4.P$1 | 24.15,70.19 C9.1
FILTERED2
  Top 0.457: R9.2 66.38,114.01 R10.2 | R10.2 69.87,111.78 C12.1 | R10.2 69.87,116.23 U$2.P$1
FILTERED3
  Top 0.457: C10.1 67.33,25.42 R12.2 67.65,23.2 | 67.65,23.2 70.83,23.2 R11.2 | 67.65,23.2 67.65,20.66 U$3.P$1
FILTERED4
  Top 0.457: R7.2 113.69,68.92 R8.2 | R8.2 111.46,67.02 C11.1 | R8.2 116.23,67.02 U$1.P$1
FLYBACK1
  Top 0.457: D4.A 18.12,71.14 U$4.P$3 14.63,71.14 13.99,70.51 U$10.V-
FLYBACK2
  Top 0.457: 70.19,119.72 70.83,119.72 U$2.P$3 | 70.19,119.72 69.24,119.72 66.38,116.86 D2.A | 70.19,119.72 70.19,124.8 U$9.V-
FLYBACK3
  Top 0.457: 67.02,17.17 66.38,17.17 U$3.P$3 | 67.02,17.17 70.83,17.17 D3.A | 67.02,17.17 67.02,12.72 U$12.V-
FLYBACK4
  Top 0.457: 119.88,66.22 120.04,66.06 U$1.P$3 | 119.88,66.22 116.55,69.56 D1.A | U$11.V- 124.48,67.02 123.85,66.38 120.04,66.38 119.88,66.22
GND  (via drill 0.38, 0.6)
  Top 0.152: U$5.P$14 U$5.P$15 U$5.P$16 U$5.P$17 72.49,69.25 72.49,69.24 72.86,69.24 | U$5.P$6 67.08,66.75 67.08,64.86 67.39,64.86 C27.2 66.63,64.6 v65.24,64.6 | U$5.P$20 U$5.P$19 U$5.P$18 70.13,70.45 70.13,72.35 70.19,72.35 | 70.19,72.35 72.86,72.35 72.86,69.24 | 70.19,72.35 70.19,75.84 C30.2 C29.2 C31.2 C28.2 62.57,75.91 61.93,76.54 v60.86,76.29 | v73.3,65.36 73.3,68.79 72.86,69.24 | C18.2 80.03,54.32 80.03,65.11 73.37,65.11 v73.3,65.36 | v66.7,51.14 65.11,51.14 U2.45 | C15.2 53.36,60.35 53.36,58.44 C14.2 53.74,58.82 54.19,59.27 54.19,59.48 54.47,59.76 55.45,59.76 56.05,59.16 56.05,56.77 56.66,56.22 59.79,56.22 60.02,56.45 60.68,56.45 60.91,56.22 64.16,56.22 v73.3,65.36 | 55.27,48.28 55.27,47.65 U2.11 | 57.49,49.55 55.27,49.55 U2.7 | 57.49,48.16 57.49,48.66 | 57.49,48.66 57.49,49.55 | 55.27,48.28 57.49,48.16 | 55.27,48.28 U2.10 | 57.81,52.73 57.81,52.09 | 57.81,52.09 57.81,49.55 57.49,49.55 | 57.81,52.73 57.81,53.68 U2.61 | 57.81,52.73 59.4,52.73 59.4,53.68 U2.58 | 67.02,45.11 65.11,45.11 U2.33 | 67.02,45.11 78.76,45.11 79.08,44.79 C16.2 79.4,44.79 80.35,43.84 85.75,43.84 JP3.GND | 67.02,45.11 66.06,46.06 65.11,46.06 U2.35 | 47.01,41.93 47.01,40.98 B2.5 | C5.2 45.74,34.63 | 48.92,35.58 47.97,35.58 C6.1 | 57.81,42.88 57.81,42.57 51.46,42.57 | 57.81,42.88 57.81,43.84 U2.20 57.81,44.15 57.81,44.79 57.49,45.11 57.49,48.16 | 57.81,42.88 59.71,42.88 59.71,43.84 U2.24 59.71,44.15 59.71,45.43 60.02,45.41 60.03,45.51 60.04,45.53 60.04,45.55 60.12,45.63 60.19,45.71 60.21,45.72 60.22,45.73 61.13,45.84 61.13,45.95 61.6,46.42 62.27,46.42 62.74,45.95 62.74,45.28 62.73,45.28 U2.33 | 64.79,45.11 U2.33
  Top 0.152: JP2.GND 94.32,94.32 93.05,94.32 v92.92,94.19 92.73,94.32 91.15,94.32 C8.2 90.83,94 88.92,94 C7.2 88.92,101.62 84.79,105.75 R4.2 84.48,106.07 83.52,107.02 48.92,107.02 47.97,106.07 R15.2 47.65,105.75 44.79,102.89 DEBUGGING_HEADER.10 | 44.03,43.2 44.28,44.41 v43.71,44.98 | U2.55 60.79,53.74 60.79,52.92 60.92,52.79 60.98,52.79 60.98,51.58 60.6,51.27 59.71,51.27 57.81,52.09 | 57.49,48.66 v58.7,48.6
  Bottom 0.152: v73.3,65.36 72.54,64.6 v65.24,64.6 65.43,64.47 65.43,52.09 v66.7,51.14 | JP3.GND 104.16,40.66 J4.6 | 55.9,88.29 56.54,87.65 56.54,85.75 C26.2 | 55.9,88.29 54,90.19 54,90.51 53.68,90.83 VOLTAGE_REGULATOR.2 | 60.35,90.51 60.35,92.73 C24.1 60.03,92.73 49.87,102.89 DEBUGGING_HEADER.10 | 60.35,90.51 60.35,83.84 NET_BRIDGE.P$1 v60.86,76.29 | 60.35,90.51 57.81,90.51 C25.2 57.81,90.19 55.9,88.29
  other vias: 31.26,43.14 31.26,41.55 31.26,39.9 31.26,38.25 31.26,36.66 31.26,35.01 31.26,33.36 31.26,31.77 32.41,30.63 34.12,30.63 35.84,30.63 37.49,30.63 39.14,30.63 39.14,32.22 39.14,33.8 39.14,35.39 39.08,36.92 39.08,38.44 33.04,43.14 34.82,43.14 36.6,43.14 38.31,43.14 39.96,43.14 41.62,43.14 43.33,43.14 45.04,43.14 46.7,43.14 49.62,42.44 50.82,41.3 50.82,39.71 50.82,38.19 50.82,36.66 50.82,35.14 50.82,33.55 50.82,31.96 50.06,30.63 48.35,30.63 46.57,30.63 44.79,30.63
  pour Route15: 43.2,44.47 43.2,95.27 94,95.27 94,43.2 50.82,43.2 50.82,55.9 81.3,55.9 81.3,82.57 55.9,82.57 55.9,57.17 49.55,57.17 49.55,44.47
  cutout Route15: 64.79,71.78 64.79,64.16 65.43,64.16 66.06,64.79 66.06,65.43 72.41,65.43 72.41,71.78
  pour Route2: 64.79,71.78 64.79,64.16 65.43,64.16 66.06,64.79 66.06,65.43 72.41,65.43 72.41,71.78
  pour Top: 30.5,43.84 30.5,29.68 39.9,29.68 39.9,38.57 45.3,38.57 45.3,41.87 48.47,41.87 48.47,38.44 48.92,38.44 48.92,34.76 43.9,34.76 43.9,29.68 51.58,29.68 51.58,42.63 50.38,42.63 50.38,43.84
  pour Route2: 30.5,43.84 30.5,29.68 51.58,29.68 51.58,42.63 50.38,42.63 50.38,43.84
  pour Top: 49.68,43.84 50.38,43.84 50.38,42.63 51.33,42.63 48.47,39.77 48.47,42.57 49.62,43.84
MISO
  Top 0.152: J4.1 100.35,49.87 77.81,49.87 76.22,48.28 65.11,48.28 U2.39
MOSI
  Top 0.152: J4.4 102.89,49.87 100.99,49.87 100.35,49.24 77.81,49.24 76.22,47.65 65.11,47.65 U2.38
N$1
  Top 0.152: FRONT_LED_1.P$2 82.57,104.16 82.57,105.75 R4.1
N$2
  Top 0.152: U$5.P$21 68.79,70.45 68.79,73.24 69.11,73.24 C30.1
N$5
  Top 0.152: FRONT_LED_2.P$2 49.87,103.84 49.87,105.75 R15.1
N$7
  Top 0.152: B2.2 47.01,39.08 47.01,37.81 47.65,37.81 C6.2
N$10
  Top 0.152: U$5.P$24 67.52,73.24 67.02,73.24 | 66.95,73.24 67.02,73.24 | 67.02,73.24 C29.1
N$12  (via drill 0.6)
  Top 0.152: C16.1 80.67,44.79 80.67,47.65 Y2.1 79.33,47.49 79.33,46.53 79.02,46.22 76.28,46.22 75.57,46.23 v72.79,46.25 | v72.98,51.14 72.02,51.01 67.78,55.25 63.4,55.25 62.95,54.81 60.05,54.81 59.91,54.67 59.91,53.93 U2.57
  Bottom 0.152: v72.98,51.14 v72.79,46.25
N$14  (via drill 0.38)
  Top 0.152: 78.44,54.32 78.44,51.46 Y2.3 | v60.09,52.16 60.35,53.68 U2.56 | v60.35,55.65 77.56,55.58 78.44,54.32 | 78.44,54.32 C18.1
  Bottom 0.152: v60.35,55.65 v60.09,52.16
N$18
  Bottom 0.152: VOLTAGE_REGULATOR.4 54.63,87.97 54.95,87.65 54.95,85.75 C26.1
PB5  (via drill 0.38)
  Top 0.152: 35.58,77.17 35.58,81.3 33.99,81.3 33.04,82.25 33.04,92.73 DEBUGGING_HEADER.6 | 35.58,77.17 35.58,71.78 34.31,70.51 29.55,70.51 26.38,67.33 R13.1 | v66.57,49.24 65.11,49.24 U2.41 | 35.58,77.17 v67.33,77.17
  Bottom 0.152: v66.57,49.24 67.97,50.82 67.97,58.76 74.25,64.98 74.32,70.19 v67.33,77.17
PE3  (via drill 0.38)
  Top 0.152: v68.54,29.55 R11.1 | v68.92,52.28 67.97,53.68 63.84,53.68 U2.49
  Bottom 0.152: v68.54,29.55 68.6,33.68 68.6,40.03 | v68.92,52.28 68.6,41.61 68.6,40.03 | DEBUGGING_HEADER.4 33.04,86.38 33.04,68.6 36.01,65.44 54.22,47.23 54.46,47.2 54.46,47.19 54.47,47.19 54.55,47.1 54.62,47.01 54.62,47 59.86,40.16 60.02,40.15 60.79,40.15 60.8,40.14 68.6,40.03
PE4
  Top 0.152: 88.92,57.81 81.3,50.19 72.41,50.19 67.65,54.95 63.52,54.95 63.21,54.63 63.21,54 U2.50 | 88.92,57.81 97.49,66.38 109.24,66.38 111.78,68.92 R7.1 | DEBUGGING_HEADER.3 36.22,82 57.08,82 57.46,83.52 60.03,83.52 60.34,82 64.92,82 88.92,57.81
PE5  (via drill 0.38, 0.6)
  Top 0.152: v66.44,110.2 R9.1 | v62.89,52.28 62.89,53.68 U2.51 | v62.89,83.46 v62.63,91.53
  Bottom 0.152: v66.44,110.2 64.22,107.97 64.16,106.07 62.25,104.16 | 62.25,104.16 33.04,104.16 33.04,91.46 DEBUGGING_HEADER.5 | v62.89,52.28 62.57,52.73 v62.89,83.46 | v62.63,91.53 62.25,104.16
RESET  (via drill 0.38, 0.6)
  Top 0.152: C13.2 106.07,89.56 106.07,87.65 R16.1 105.75,87.34 v105.5,75.14 | U2.12 53.62,47.14 v52.85,46.31 | J4.5 101.37,30.69 v77.81,30.82 | v77.75,36.66 v63.01,36.79
  Bottom 0.152: v105.5,75.14 102.89,72.1 102.89,47.33 J4.5 | v77.81,30.82 v77.75,36.66 | v63.01,36.79 60.66,36.85 60.66,39.85 59.71,39.85 54.31,46.91 53.62,46.31 v52.85,46.31
RFANT
  Top 0.457: U$8.FEED 41.93,37.49 C5.1 46.24,37.99 B2.1
RFN
  Top 0.152: U2.9 54.95,48.79 53.74,48.79 48.16,42.57 48.16,40.09 47.58,40.09 B2.3
RFP
  Top 0.152: B2.4 47.65,40.98 47.65,42.57 53.68,49.24 54.95,49.24 U2.8
RX0  (via drill 0.38)
  Top 0.152: v63.01,50.76 63.84,51.77 64.79,51.77 U2.46
  Bottom 0.152: v63.01,50.76 64.47,52.41 64.47,64.08 64.33,64.23 64.33,64.98 64.47,65.13 64.47,75.27 66.53,77.33 66.53,77.51 67,77.98 67.18,77.98 86.7,97.49 JP2.TXO
RX1
  Top 0.152: JP3.RXI 84.48,34.95 61.3,34.95 61.3,43.84 U2.27
SCK
  Top 0.152: J4.3 81.47,48.6 81.19,48.88 79.9,48.88 79.03,48 79.03,46.66 78.89,46.52 77.6,46.52 76.96,47.17 U2.37
SCL  (via drill 0.38, 0.6)
  Top 0.152: R2.1 62.82,70.51 62.82,70.44 | R2.1 64.98,70.51 64.98,69.24 66.5,69.24 U$5.P$2 | R2.1 v60.92,70.51 | v61.93,45.62 60.35,45.43 60.35,44.15 U2.25
  Bottom 0.152: 59.4,70.51 v60.92,70.51 60.98,70.51 61.93,69.56 v61.93,45.62 61.62,41.93 61.02,41.87 61.02,41.66 60.55,41.2 59.89,41.2 59.42,41.66 59.42,41.71 59.14,41.68 56.73,44.85 56.79,57.49 DEBUGGING_HEADER.1
SDA  (via drill 0.38, 0.6)
  Top 0.152: U$5.P$4 66.5,68.35 65.05,68.35 64.88,68.51 63.52,68.51 63.43,68.61 R3.2 v60.92,68.61 v60.92,68.6 | 60.66,43.84 U2.26 60.65,43.56 60.65,43.16 60.51,43.03 60.5,43.03 v60.22,42 | DEBUGGING_HEADER.2 35.27,81.62 55.58,81.62 v59.65,78.13
  Bottom 0.152: v60.92,68.6 59.4,68.6 59.08,68.92 59.08,77.49 v59.65,78.13 | v60.22,42 60.98,42.88 60.95,55.12 61.15,55.32 61.15,55.98 60.95,56.18 v60.92,68.6 | 60.98,68.6 v60.92,68.6
TX0  (via drill 0.38)
  Top 0.152: 65.11,52.09 U2.47 65.32,52.04 65.79,52.04 66.3,51.87 66.37,51.94 67.03,51.94 67.5,51.47 67.5,51.33 v70.63,50.31
  Bottom 0.152: v70.63,50.31 103.84,86.7 103.84,93.68 JP2.RXI
TX1
  Top 0.152: U2.28 61.78,35.25 86.71,35.25 JP3.TXO
V
  Bottom 0.152: BATT1.+ 81.62,97.49 81.62,99.4 POWER_SWITCH.2
VBAT  (via drill 0.6)
  Top 0.457: U$10.V+ 13.99,67.02 16.21,67.02 18.12,65.11 D4.C 18.12,65.43 v29.23,65.43 32.73,65.43 33.04,65.75 C23.1 | U$11.V+ 124.48,70.19 120.67,70.19 120.04,69.56 D1.C 119.72,69.56 117.5,71.78 v107.97,71.78 104.8,71.78 104.16,71.14 C17.1 | U$9.V+ 66.38,124.8 D2.C 66.38,117.81 65.75,117.81 65.11,117.18 65.11,107.97 v65.62,107.97 | FRONT_LED_2.P$1 41.3,97.81 DEBUGGING_HEADER.8 | v71.78,29.23 72.73,29.23 72.73,22.56 70.83,20.66 D3.C 70.83,20.34 71.78,20.34 71.78,16.53 71.14,15.9 70.19,15.9 70.19,12.72 U$12.V+ | FRONT_LED_1.P$1 84.48,103.84 84.48,99.72 POWER_SWITCH.1 | v74.32,31.14 73.68,31.14 71.46,33.36 C21.1 | v62.57,106.07 63.52,106.07 65.43,104.16 C19.1
  Bottom 0.457: 53.2,91.94 53.36,92.1 54.63,92.1 | 53.2,91.94 52.73,91.46 52.73,91.15 VOLTAGE_REGULATOR.1 | 54.63,92.1 54.63,91.15 VOLTAGE_REGULATOR.3 | C24.2 54.63,92.73 54.63,92.1 | 53.2,91.94 52.73,92.41 52.79,97.81 DEBUGGING_HEADER.8
  other vias: 31.14,62.89 106.07,73.68
  pour Route2: 30.5,44.47 30.5,106.7 106.7,106.7 106.7,30.5 52.09,30.5 52.09,40.66 96.54,40.66 96.54,97.81 40.66,97.81 40.66,44.47
  pour Route2: 11.45,73.05 30.5,73.05 30.5,64.16 11.45,64.16
  pour Route2: 64.16,127.66 73.05,127.66 73.05,106.7 64.16,106.7
  pour Route2: 127.66,73.05 127.66,64.16 106.7,64.16 106.7,73.05
  pour Route2: 64.16,9.55 73.05,9.55 73.05,30.5 64.16,30.5

## Text on the board
tPlace: GND | BAT_GND | VBAT | 3.0V | PB5 | PE5 | PE3 | PE4 | SDA | SCL
bPlace: GND | BAT_GND | VBAT | 3.0V | PB5 | PE5 | PE3 | PE4 | SDA | SCL